# EAGLE board LM723 voltage regulator.v1.0b (EAGLE 9.1.3)
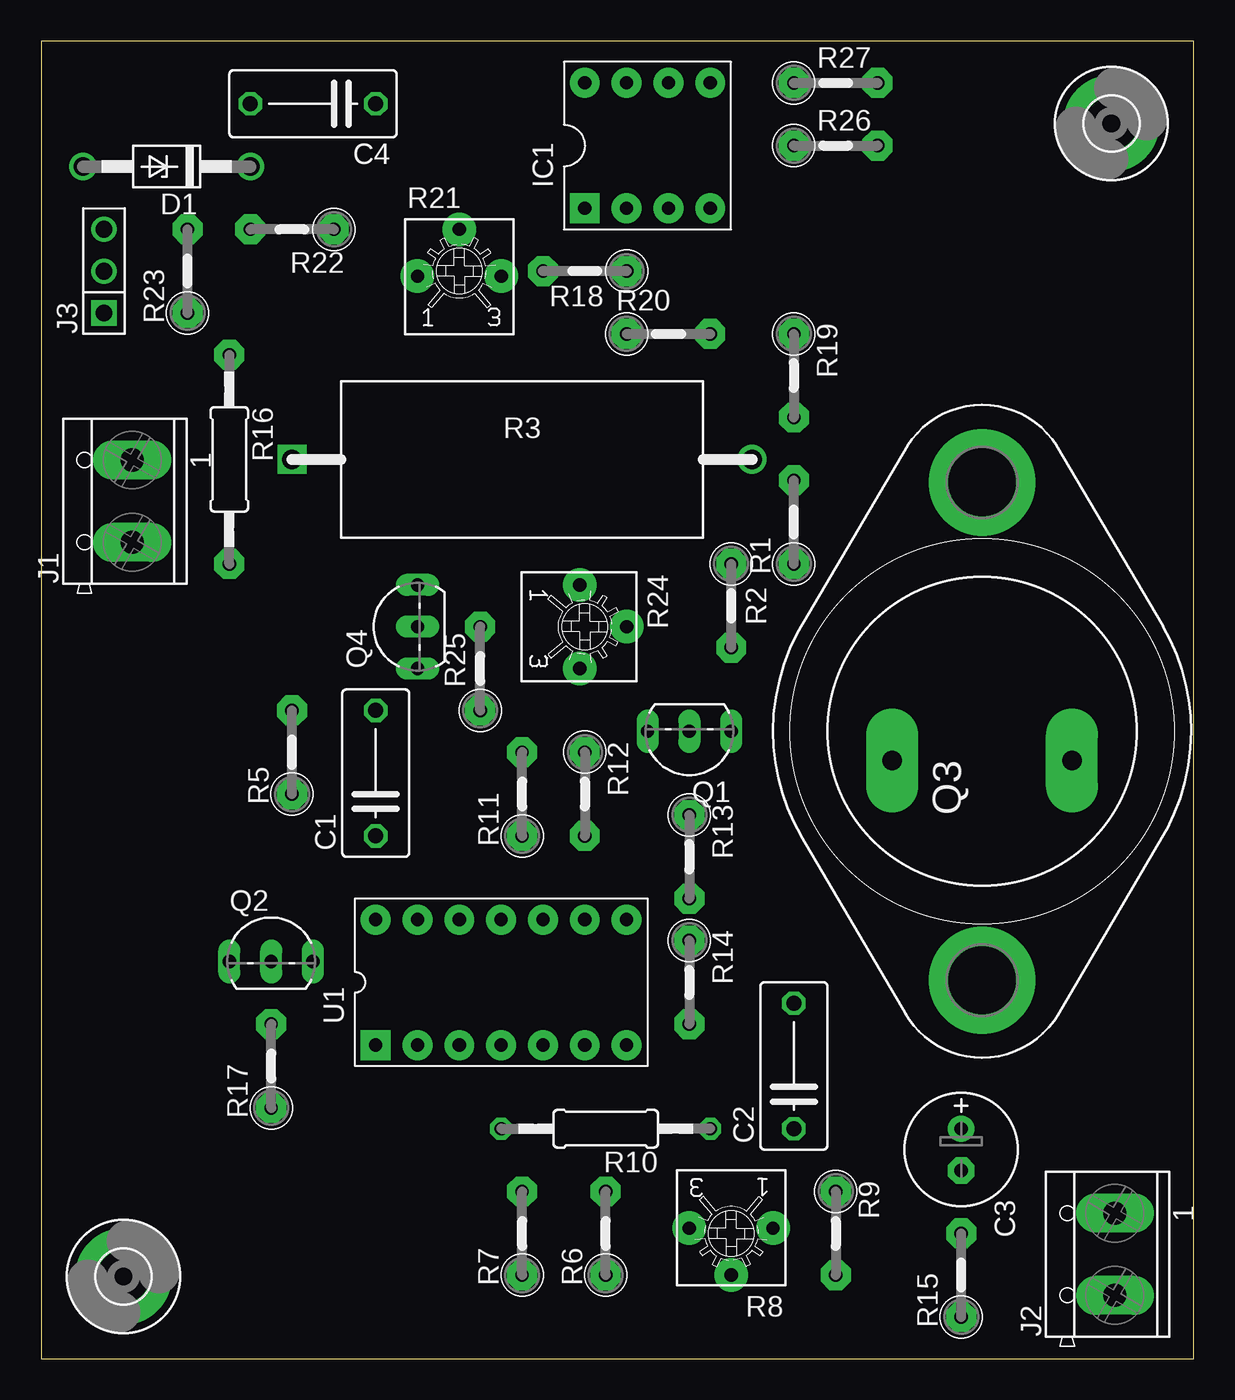
[diagram p0: board, top side]
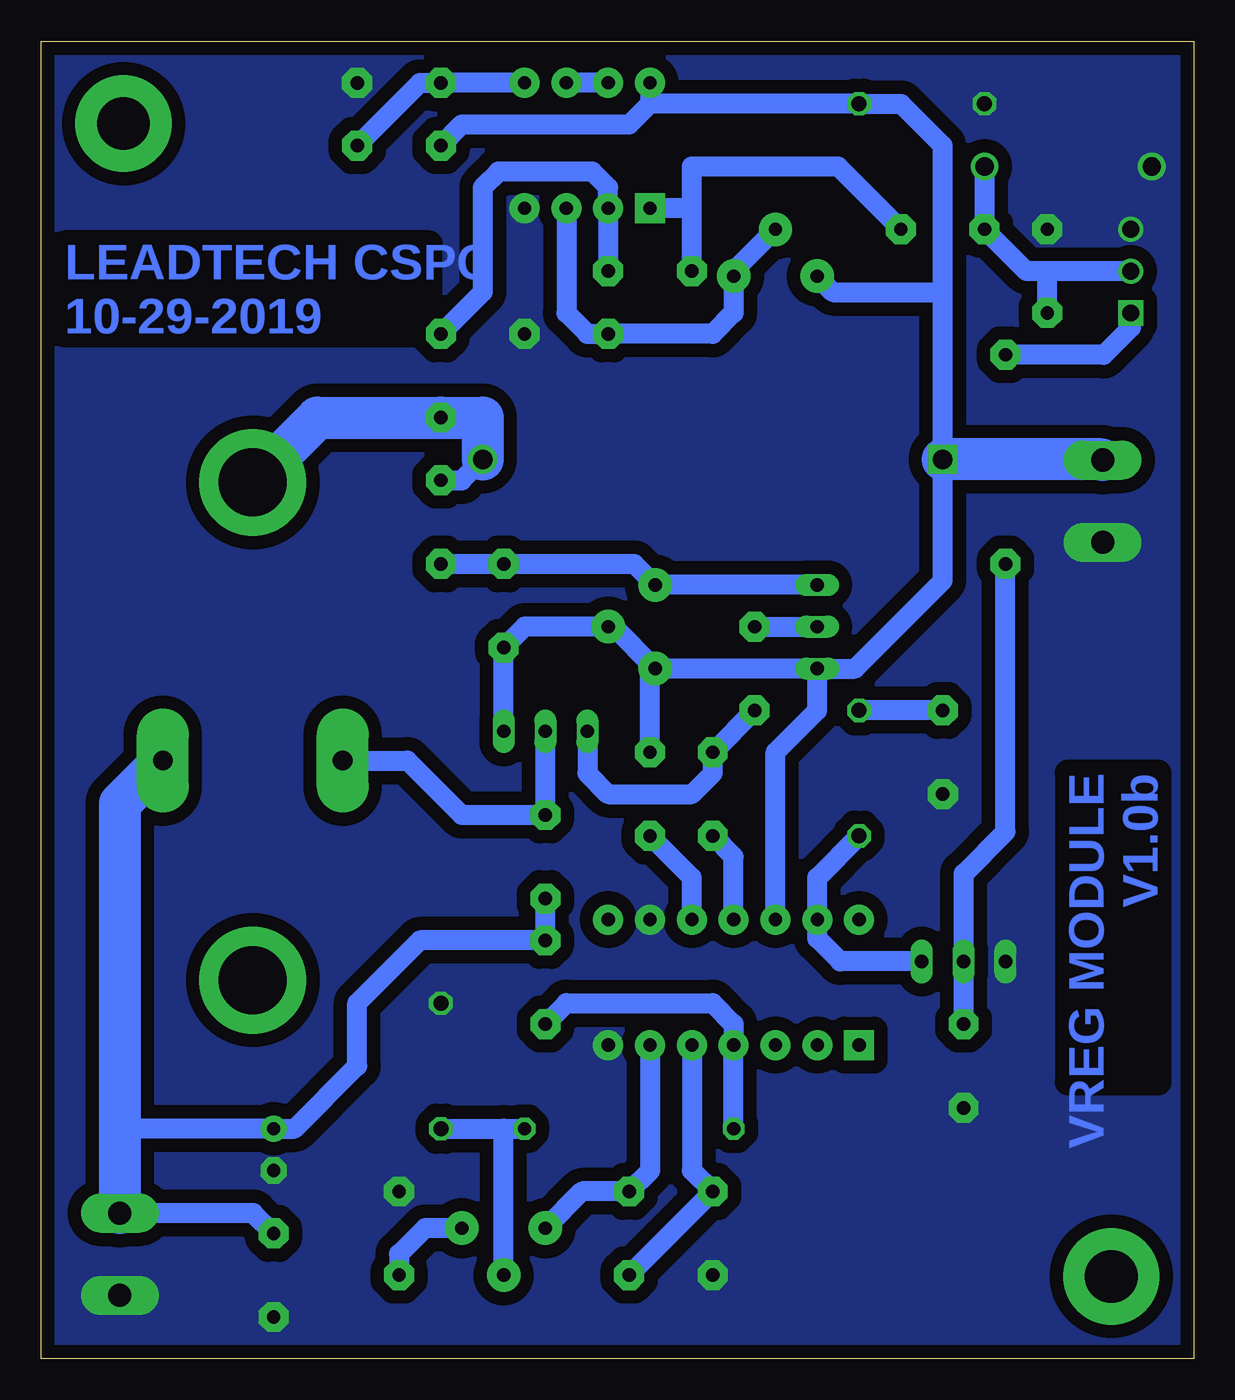
[diagram p1: board, bottom side, seen from below]

Size 70 x 80 mm. Coordinates in mm from the lower left corner, seen from the top.
Outline: 0,0 70,0 70,80 0,80 0,0
Copper layers (1*16): Top 0.035mm / dielectric 1.5mm / Bottom 0.035mm
Design rules "dirt_cheap_dirty_boards.v1.1": minimum track width 6mil, minimum drill 12mil, track to track 6mil, track to pad 6mil, pad to pad 6mil, via to via 6mil, smd to smd 0mil, copper to edge 10mil, drill to drill 10mil, minimum pad ring 10mil, minimum via ring 6mil, stop-mask expansion 2mil, vias tented up to drill 25mil, thermal gap 10mil

## Footprints (pad centres in the part's own frame; a part is rotated, then mirrored left to right if it is on the bottom)
C075-042X103 = drill 0.914 octagon: 1 -3.81,0; 2 3.81,0
E2,5-7 = drill 0.813 pad 1.6: + -1.27,0 | drill 0.813 pad 1.6 octagon: - 1.27,0
DO41Z10 = drill 1.118: A 5.08,0; C -5.08,0
3,2-PAD = drill 3.2 pad 5.842: B3,2 0,0
DIP8-EXPAD = drill 0.8 pad 1.816 square: 1 -3.81,-3.81 | drill 0.8 pad 1.816: 2 -1.27,-3.81; 3 1.27,-3.81; 4 3.81,-3.81; 5 3.81,3.81; 6 1.27,3.81; 7 -1.27,3.81; 8 -3.81,3.81
TERMINAL_BLOCK_2P_5 = drill 1.4 pad 2.38 long: 1 2.5,-0.45; 2 -2.5,-0.45
M1X3 = drill 1.02 square: 1 0,0 | drill 1.02: 2 2.54,0; 3 5.08,0
TO-92 = drill 0.813 long: 1 -2.54,0; 2 0,0; 3 2.54,0
TO3 = drill 1.194 pad 3.15 long: B -1.778,5.461; E -1.778,-5.461 | drill 4.115 pad 6.477: C 15.113,0; C/ -15.113,0
R_5V_EXPAD = drill 0.813 pad 1.816 octagon: 1 -2.54,0; 2 2.54,0
RESISTOR_5W = drill 1.18 square: 1 -13.97,0 | drill 1.18: 2 13.97,0
TRIMMER_3362P_EXPAD = drill 0.813 pad 2.032: 1 -2.54,-0.31; 2 0,2.54; 3 2.54,-0.31
0207/12 = drill 0.813 octagon: 1 -6.35,0; 2 6.35,0
R-5_EXPAD = drill 0.813 pad 1.816 octagon: 1 -6.35,0; 2 6.35,0
DIP14-EXPAD = drill 0.8 pad 1.816 square: 1 -7.62,-3.81 | drill 0.8 pad 1.816: 2 -5.08,-3.81; 3 -2.54,-3.81; 4 0,-3.81; 5 2.54,-3.81; 6 5.08,-3.81; 7 7.62,-3.81; 8 7.62,3.81; 9 5.08,3.81; 10 2.54,3.81; 11 0,3.81; 12 -2.54,3.81; 13 -5.08,3.81; 14 -7.62,3.81

## Placement (x,y rotation side)
C1  0.47uF  [C075-042X103]  20.32,35.56 90 top
C2  0.1uF  [C075-042X103]  45.72,17.78 90 top
C3  100uF 35V  [E2,5-7]  55.88,12.7 270 top
C4  0.1uF  [C075-042X103]  16.51,76.2 180 top
D1  6.3V  [DO41Z10]  7.62,72.39 180 top
H1  MOUNT-PAD-ROUND3.2  [3,2-PAD]  5,5 0 top
H2  MOUNT-PAD-ROUND3.2  [3,2-PAD]  65,75 0 top
IC1  LM358  [DIP8-EXPAD]  36.83,73.66 0 top
J1  CON_TERMINAL_BLOCK_02-5MM  [TERMINAL_BLOCK_2P_5]  5.08,52.07 90 top
J2  CON_TERMINAL_BLOCK_02-5MM  [TERMINAL_BLOCK_2P_5]  64.77,6.35 90 top
J3  CON_HEADER_1X03-PTH  [M1X3]  3.81,63.5 90 top
PAGE1  FRAME_DINA4_L  [DP_LOGO]  1.27,-5.08 0 top  (outside the outline)
Q1  2SA1015  [TO-92]  39.37,38.1 180 top
Q2  2N3904  [TO-92]  13.97,24.13 0 top
Q3  2N3055  [TO3]  57.15,38.1 90 top
Q4  2SA1015  [TO-92]  22.86,44.45 90 top
R1  10R  [R_5V_EXPAD]  45.72,50.8 90 top
R2  10R  [R_5V_EXPAD]  41.91,45.72 270 top
R3  1R 5W  [RESISTOR_5W]  29.21,54.61 0 top
R5  470R  [R_5V_EXPAD]  15.24,36.83 90 top
R6  10K  [R_5V_EXPAD]  34.29,7.62 90 top
R7  100K  [R_5V_EXPAD]  29.21,7.62 90 top
R8  10K  [TRIMMER_3362P_EXPAD]  41.91,7.62 180 top
R9  3.3K  [R_5V_EXPAD]  48.26,7.62 270 top
R10  10K  [0207/12]  34.29,13.97 180 top
R11  2.2K  [R_5V_EXPAD]  29.21,34.29 90 top
R12  100K  [R_5V_EXPAD]  33.02,34.29 270 top
R13  47R  [R_5V_EXPAD]  39.37,30.48 270 top
R14  100K  [R_5V_EXPAD]  39.37,22.86 270 top
R15  100K  [R_5V_EXPAD]  55.88,5.08 90 top
R16  1K  [R-5_EXPAD]  11.43,54.61 270 top
R17  10K  [R_5V_EXPAD]  13.97,17.78 90 top
R18  30K  [R_5V_EXPAD]  33.02,66.04 180 top
R19  10K  [R_5V_EXPAD]  45.72,59.69 270 top
R20  10K  [R_5V_EXPAD]  38.1,62.23 0 top
R21  5K  [TRIMMER_3362P_EXPAD]  25.4,66.04 0 top
R22  10K  [R_5V_EXPAD]  15.24,68.58 180 top
R23  10K  [R_5V_EXPAD]  8.89,66.04 90 top
R24  50R  [TRIMMER_3362P_EXPAD]  33.02,44.45 270 top
R25  0R  [R_5V_EXPAD]  26.67,41.91 90 top
R26  10K  [R_5V_EXPAD]  48.26,73.66 0 top
R27  10K  [R_5V_EXPAD]  48.26,77.47 0 top
U1  LM723-EXPAD  [DIP14-EXPAD]  27.94,22.86 0 top

## Library data of the parts
C1-C4 = rcl; SPICEPREFIX: C
D1 = diode
H1 H2 = holes
IC1 R1-R3 R5-R9 R11-R27 U1 = trosh_devices.eagle.v9
J1-J3 Q1 Q2 Q4 = dp_devices.v6
PAGE1 = dp_devices.v6; PROJECT: Projectname
Q3 = transistor-npn
R10 = rcl; SPICEPREFIX: R

## Nets
!VREG_EN: J3.1 R16.1
ADC: D1.C J3.2 R22.2 R23.1
GND: C2.2 C3.- C4.2 D1.A IC1.4 J1.2 J2.2 J3.3 Q2.1 R5.1 R7.1 R9.1 R15.1 R17.1 R20.2 R23.2 R27.2 U1.7 U1.9
N$1: Q3.C Q3.C/ R1.2 R3.2 R19.2
N$2: Q4.3 R1.1 R2.1 R24.1
N$3: Q1.2 Q3.B R13.1
N$4: IC1.2 R18.1 R19.1
N$6: C1.2 R5.2
N$7: C1.1 Q2.3 U1.13
N$8: R6.1 R7.2 U1.5
N$9: R6.2 R8.3 U1.6
N$10: R8.1 R9.2
N$11: C2.1 R8.2 R10.1
N$12: R10.2 R14.2 U1.4
N$13: Q1.3 R11.2 R25.1
N$14: R11.1 U1.11
N$15: R12.2 U1.10
N$16: IC1.3 R20.1 R21.2 R21.3
N$17: Q2.2 R16.2 R17.2
N$18: IC1.1 R18.2 R22.1
N$19: Q4.2 R25.2
N$20: IC1.6 IC1.7
N$21: IC1.5 R26.2 R27.1
VIN: C4.1 IC1.8 J1.1 Q1.1 Q4.1 R2.2 R3.1 R12.1 R21.1 R24.2 R24.3 R26.1 U1.12
VOUT: C3.+ J2.1 Q3.E R13.2 R14.1 R15.2

## Tracks (layer width: path | path; a pad name or v marks a point on that pad's centre or on a via)
!VREG_EN
  Bottom 1.219: J3.1 3.81,62.61 5.46,60.96 R16.1
ADC
  Bottom 1.219: D1.C R22.2 10.16,66.04 8.89,66.04 | J3.2 8.89,66.04 | R23.1 8.89,66.04
GND
  pour Bottom (isolate 0.813, rank 6, no thermals): 0,80 70,80 70,0 0,0
N$1
  Bottom 1.219: R1.2 44.45,53.34 R3.2
  Bottom 2.54: Q3.C 53.21,57.15 R19.2 43.18,57.15 R3.2
N$2
  Bottom 1.219: Q4.3 R24.1 33.98,48.26 R2.1 R1.1
N$3
  Bottom 1.219: Q1.2 R13.1 44.45,33.02 47.75,36.32 Q3.B
N$4
  Bottom 1.219: R18.1 IC1.2 35.56,71.12 36.51,72.07 42.23,72.07 43.18,71.12 43.18,64.77 R19.1
N$6
  Bottom 1.219: R5.2 C1.2
N$7
  Bottom 1.219: C1.1 22.86,29.21 U1.13 22.86,25.53 21.46,24.13 Q2.3
N$8
  Bottom 1.219: U1.5 30.48,11.43 R7.2 R6.1
N$9
  Bottom 1.219: U1.6 33.02,11.43 R6.2 37.14,10.16 R8.3
N$10
  Bottom 1.219: R8.1 46.68,7.93 48.26,6.35 R9.2
N$11
  Bottom 1.219: C2.1 41.91,13.97 | 41.91,13.97 R10.1 | R8.2 41.91,13.97
N$12
  Bottom 1.219: R10.2 U1.4 27.94,20.32 29.21,21.59 38.1,21.59 R14.2
N$13
  Bottom 1.219: Q1.3 36.83,35.56 35.56,34.29 30.48,34.29 29.21,35.56 R11.2 R25.1
N$14
  Bottom 1.219: U1.11 27.94,30.48 R11.1
N$15
  Bottom 1.219: U1.10 30.48,29.21 R12.2
N$16
  Bottom 1.219: R21.2 27.94,66.04 R21.3 27.94,63.5 29.21,62.23 R20.1 36.83,62.23 38.1,63.5 IC1.3
N$17
  Bottom 1.219: R17.2 Q2.2 13.97,29.46 11.43,32 R16.2
N$18
  Bottom 1.219: R22.1 21.59,72.39 30.48,72.39 30.48,69.85 | 30.48,69.85 IC1.1 | R18.2 30.48,69.85
N$19
  Bottom 1.219: R25.2 Q4.2
N$20
  Bottom 1.219: IC1.7 IC1.6
N$21
  Bottom 1.219: IC1.5 R27.1 46.99,77.47 R26.2
VIN
  Bottom 1.219: Q4.1 22.86,39.37 25.4,36.83 U1.12 | R24.3 35.25,44.45 R24.2 40.64,44.45 R2.2 Q1.1 | 15.24,64.77 15.24,73.66 17.78,76.2 C4.1 33.02,76.2 | Q4.1 20.57,41.91 15.24,47.24 R3.1 15.24,64.77 | R12.1 33.02,41.6 R24.3 | Q4.1 R24.3 | R21.1 21.9,64.77 15.24,64.77 | IC1.8 33.02,76.2 | 33.02,76.2 34.29,74.93 44.45,74.93 R26.1
  Bottom 2.54: J1.1 5.57,54.61 R3.1
VOUT
  Bottom 1.219: R13.2 R14.1 46.99,25.4 50.8,21.59 50.8,17.78 54.61,13.97 C3.+ 65.22,13.97 | R15.2 57.11,8.85 J2.1
  Bottom 2.54: Q3.E 65.22,33.71 65.22,13.97 J2.1

## Text on the board
Bottom: LEADTECH CSPG / 10-29-2019 | VREG MODULE / V1.0b
Document: ARDUINO SIDE